# Altium PCB onThyristor 3x.PcbDoc
Units mm, origin at the board's own origin, x right, y up, seen from the top; angles counter-clockwise.
Board outline 152.4 x 101.6 mm, 2 copper layers (Top Layer, Bottom Layer); 43 components, 26 nets, 102 pads, 10 vias.
Unrouted connection lines stored in the file: 1.
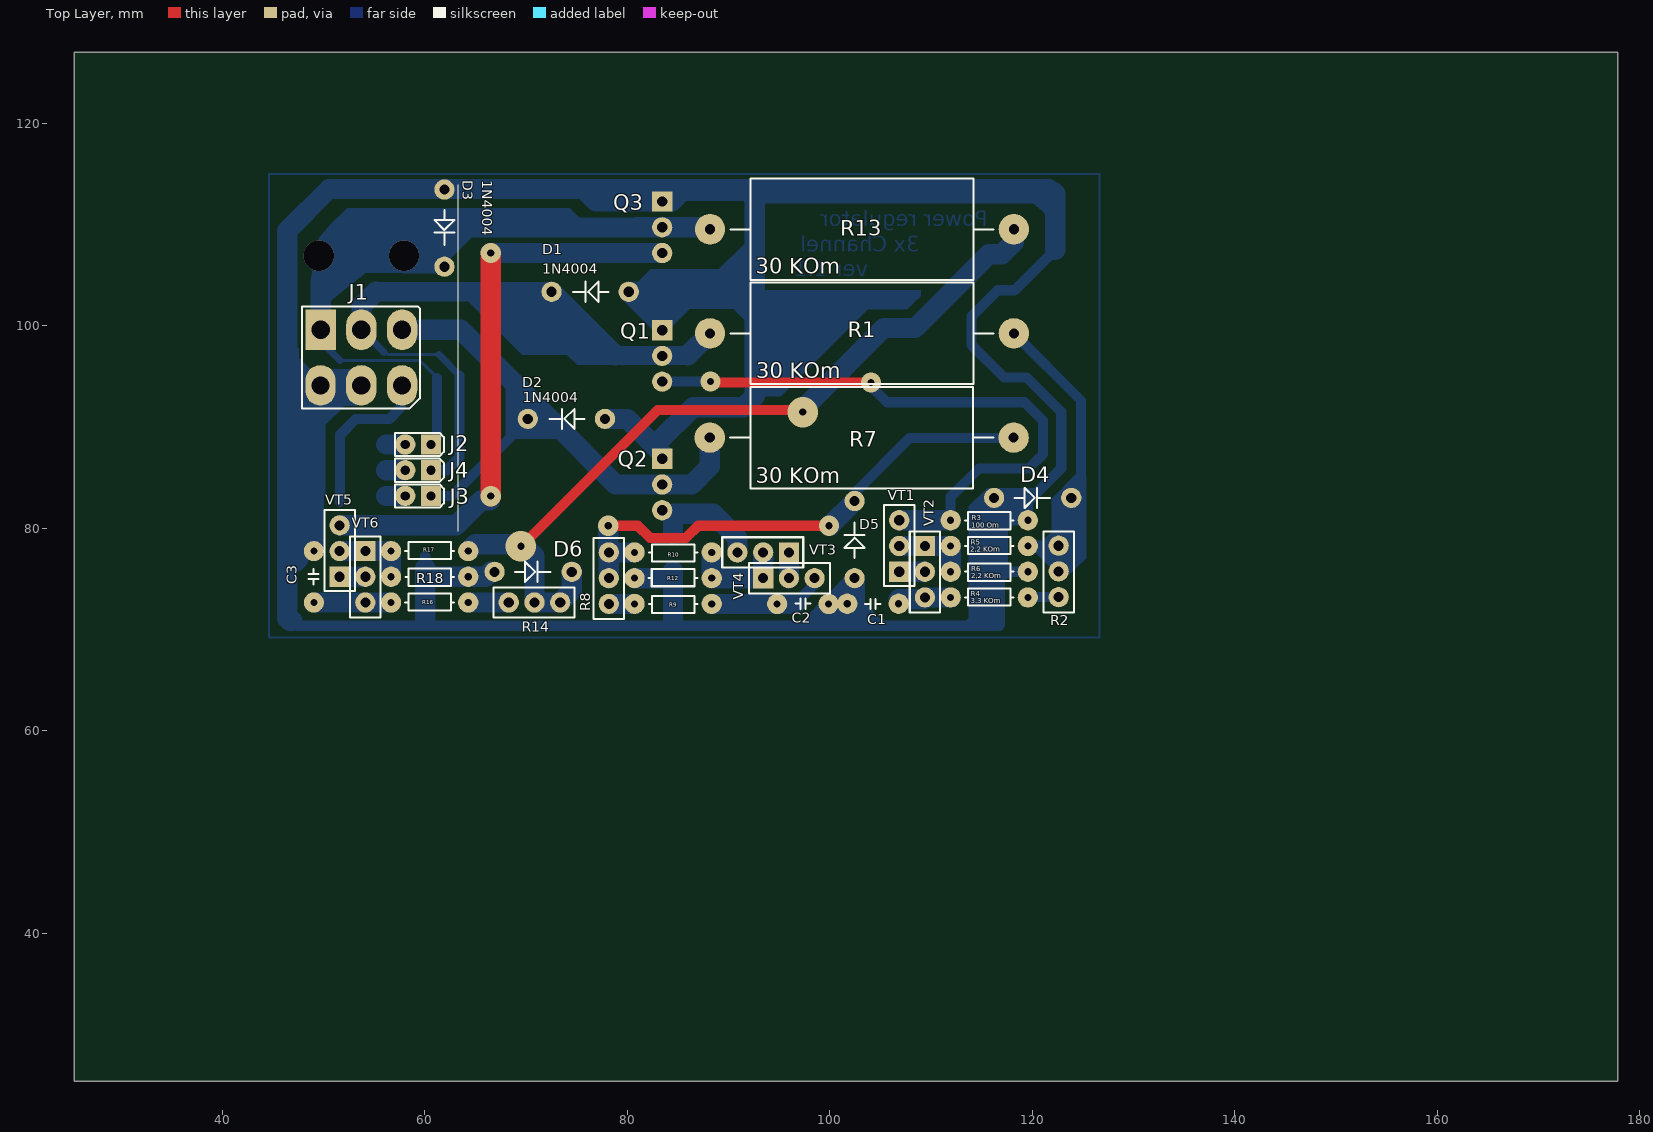
[diagram p0: Top Layer view]
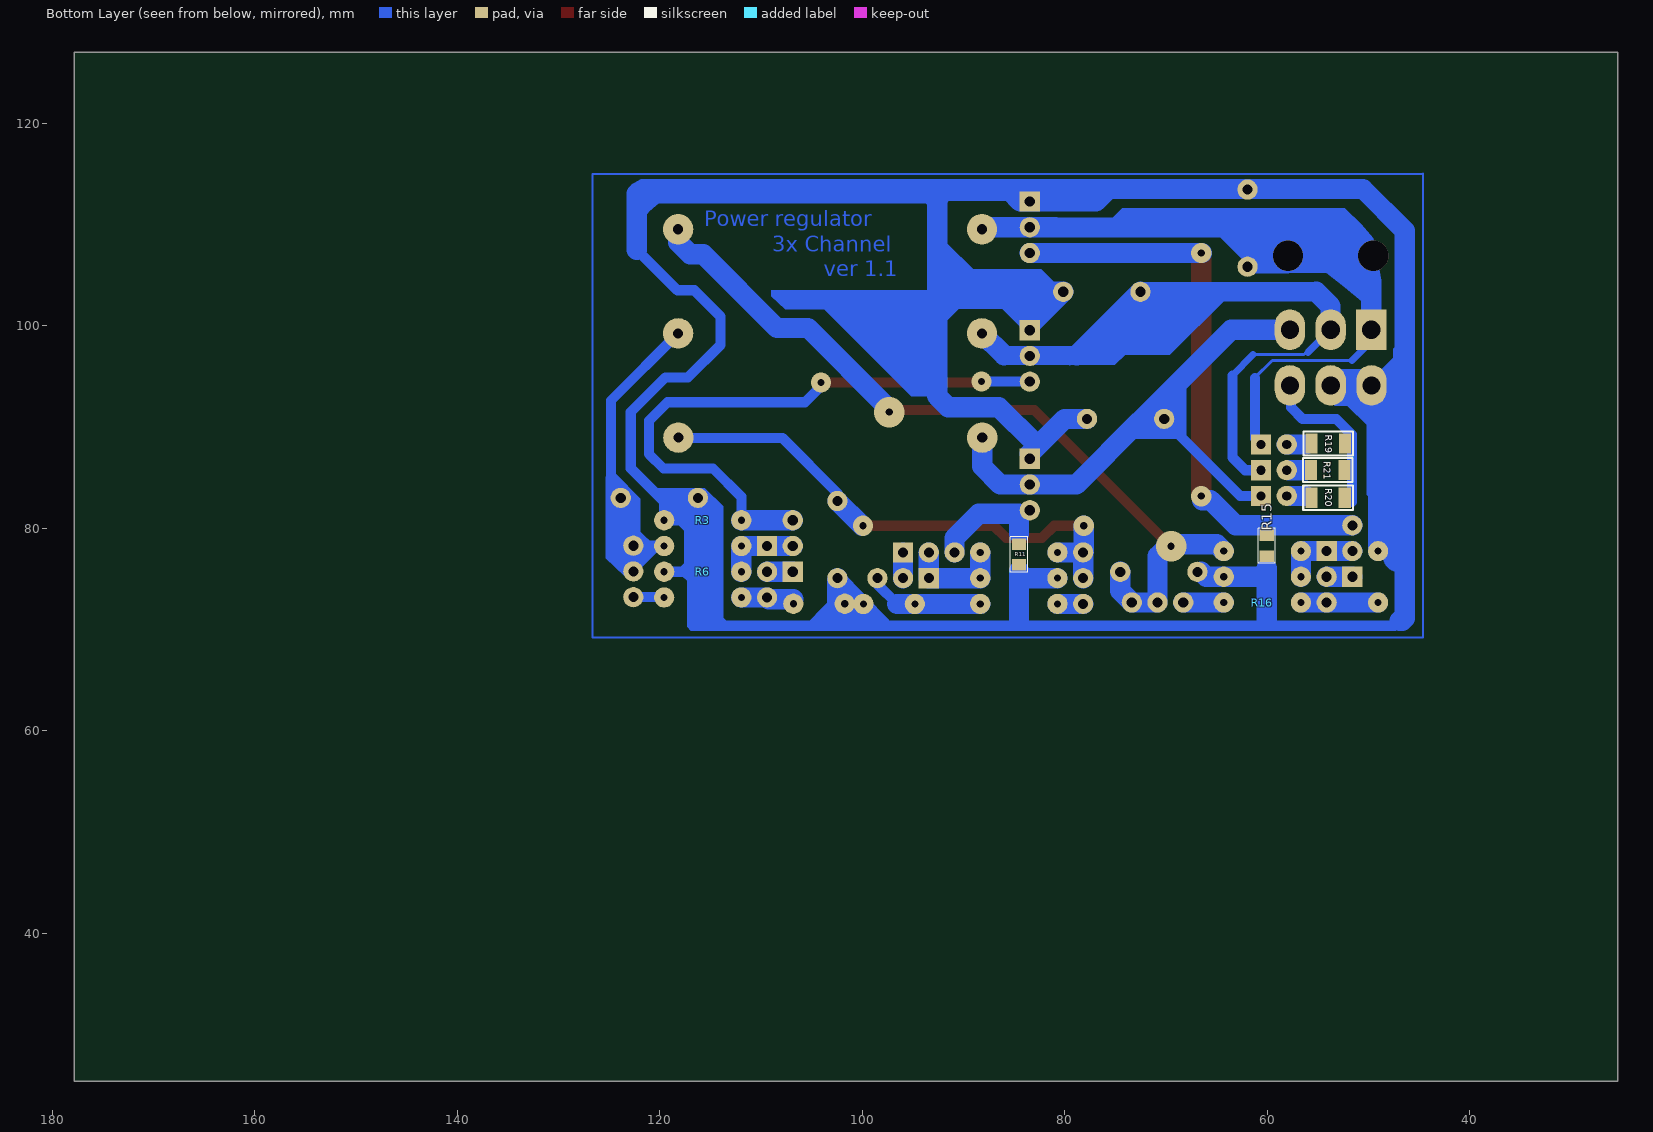
[diagram p1: Bottom Layer view, seen from below]
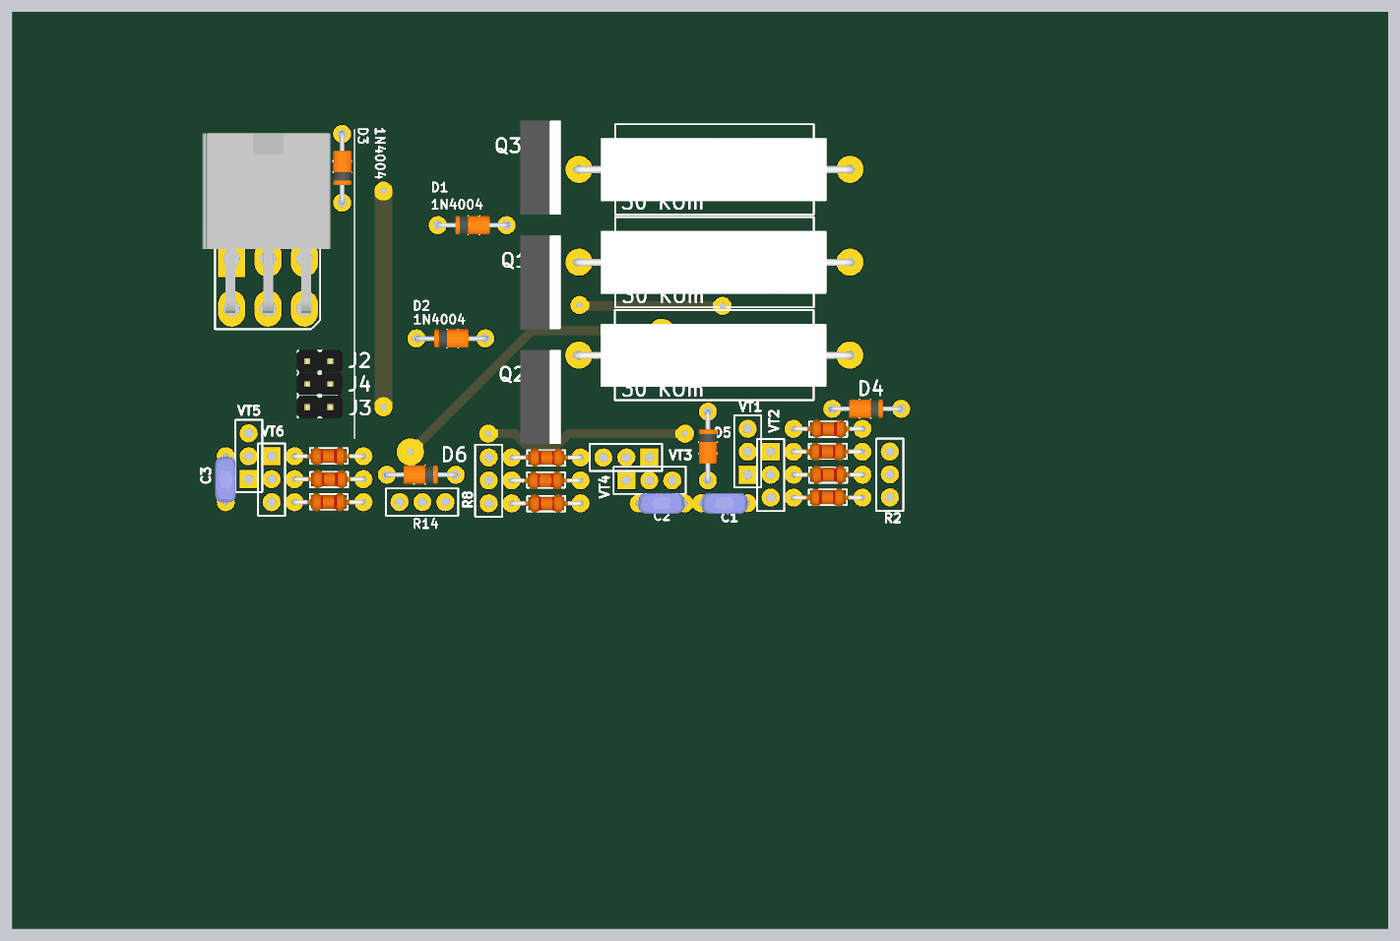
[diagram p2: 3D render of the assembled board from above, using the file's embedded part models]
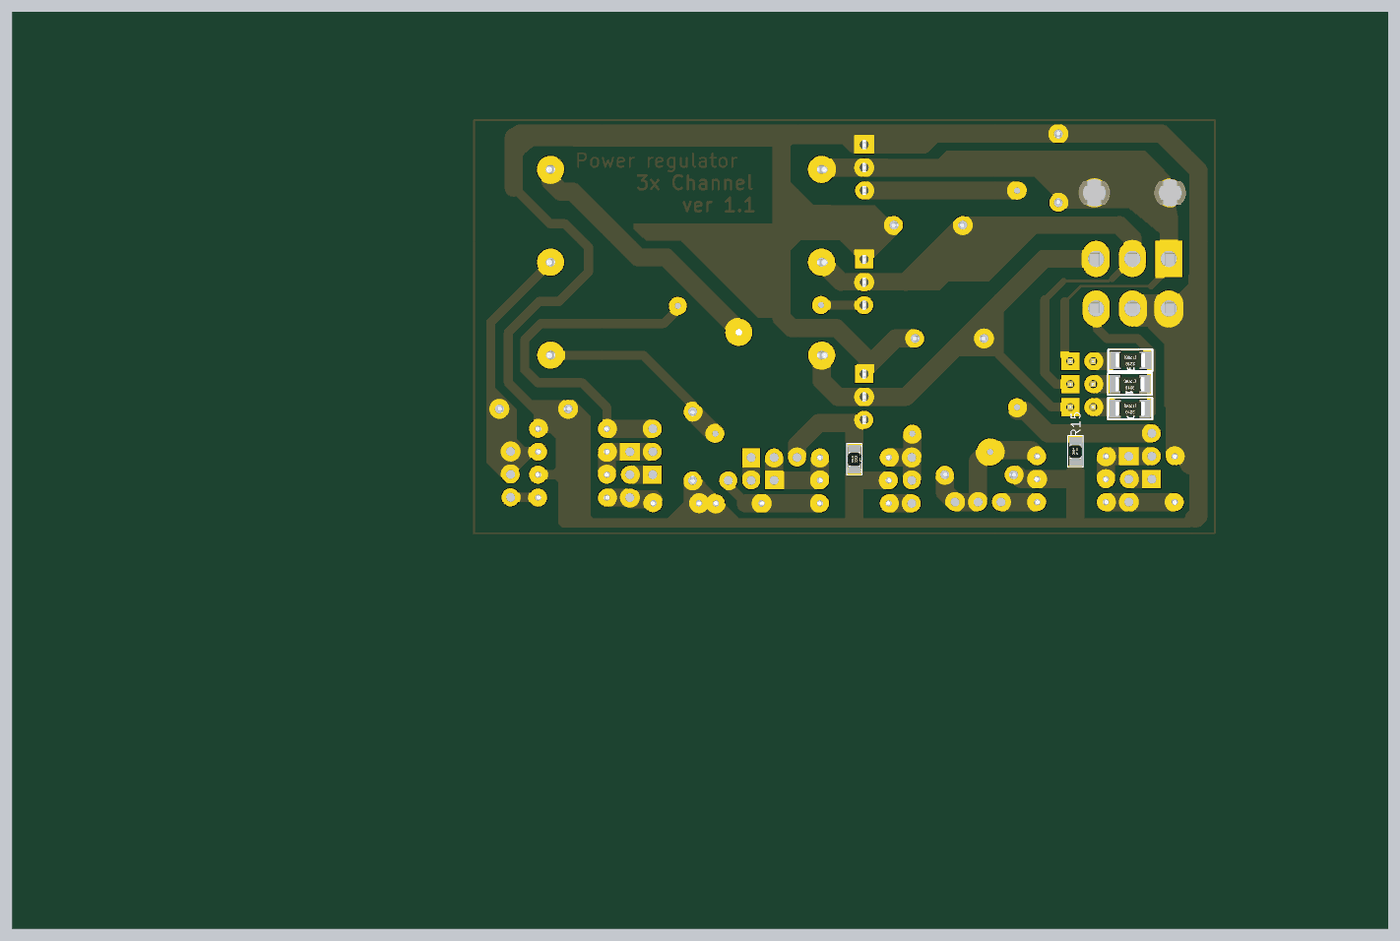
[diagram p3: 3D render of the assembled board from below, using the file's embedded part models]

## Layer stack, top to bottom
Top Solder: solder mask 0.0102, Solder Resist, Dk 3.5
Top Layer: signal copper 0.0356
Dielectric 1: dielectric 0.32, FR-4, Dk 4.8
Bottom Layer: signal copper 0.0356
Bottom Solder: solder mask 0.0102, Solder Resist, Dk 3.5

## Board outline
25.4,25.4 177.8,25.4 177.8,127 25.4,127

## Design rules (kind name [scope] priority, off if disabled: settings)
Clearance [All] p1: gap=0.5
ComponentClearance [All] p1: gap=0 collisioncheckmode=3 verticalgap=0 showdistances=FALSE
PlaneConnect [All] p1: planeconnectstyle=Relief reliefexpansion=0.508 reliefentries=4 reliefconductorwidth=0.254 reliefairgap=1
PolygonConnect [All] p1: connectstyle=Relief reliefconductorwidth=0.254 reliefentries=4 polygonreliefangle="90 Angle" airgapwidth=0.254
RoutingVias [All] p1: holewidth=0.7 width=2 viastyle="Through Hole" minholewidth=0.7 minwidth=2 maxholewidth=0.7 maxwidth=2
SolderMaskExpansion [All] p1: expansion=0.102
Width Width_1 [(InNet('OUT 1') OR InNet('OUT 3') OR InNet('OUT 2'))] p1: maxlimit=3 minlimit=0.3 preferedwidth=1 minimp=50.000000 maximp=50.000000 favimp=50.000000
Width "Width 0,2-3" [All] p2: maxlimit=3 minlimit=1 preferedwidth=1 minimp=50.000000 maximp=50.000000 favimp=50.000000
27 further rules are at their usual default settings.

## Components (designator, comment, footprint, x,y, rotation, side; value= is the part's Value field where it differs from the comment)
C1 "0.1mF" "Cap P5.08MM (3p) disk2" 106.8,72.55 r180 top
C2 "0.1mF" "Cap P5.08MM (3p) disk2" 94.8,72.525 r0 top
C3 "0.1mF" "Cap P5.08MM (3p) disk2" 49.06,72.67 r90 top
D1 "1N4004" "Diode DO-35" 80.15,103.35 r180 top
D2 "1N4004" "Diode DO-35" 77.8,90.8 r180 top
D3 "1N4004" "Diode DO-35" 61.95,113.45 r270 top
D4 "BZX55C" "Diode DO-35" 116.225,83 r0 top
D5 "BZX55C" "Diode DO-35" 102.45,75.075 r90 top
D6 "BZX55C" "Diode DO-35" 66.9,75.7 r0 top
J1 "connector" "Molex Mini-Fit Jr - 6Pin R" 57.765,99.61 r270 top
J2 "PLS-2" "Line 2.54 x 2" 60.62,88.275 r270 top
J3 "PLS-2" "Line 2.54 x 2" 60.62,83.195 r270 top
J4 "PLS-2" "Line 2.54 x 2" 60.62,85.735 r270 top
Q1 "BT151-500R" TO220-2 83.45,99.56 r180 top
Q2 "BT151-500R" TO220-2 83.45,86.86 r180 top
Q3 "BT151-500R" TO220-2 83.45,112.26 r180 top
R1 "30 KOm" "Res 5W L22mm, p30mm" 118.175,99.25 r180 top
R2 "100K" "PinLine 3x" 122.6,73.2 r90 top
R3 "100 Om" "Res p7.62 (4p) 0.25w"#1 119.555,80.79 r0 bottom
R4 "3.3 KOm" "Res p7.62 (4p) 0.25w"#2 111.935,73.17 r0 top
R5 "2,2 KOm" "Res p7.62 (4p) 0.25w"#2 111.935,78.25 r0 top
R6 "2,2 KOm" "Res p7.62 (4p) 0.25w"#1 119.555,75.71 r0 bottom
R7 "30 KOm" "Res 5W L22mm, p30mm" 118.15,88.95 r180 top
R8 "100K" "PinLine 3x" 78.18,72.535 r90 top
R9 "3.3 ROm" "Res p7.62 (4p) 0.25w"#2 88.34,72.535 r180 top
R10 "2.2 KOm" "Res p7.62 (4p) 0.25w"#2 88.34,77.615 r180 top
R11 "100 Om" "SMD 0805 (2012)" 84.5,76.4 r90 bottom
R12 "2.2 KOm" "Res p7.62 (4p) 0.25w"#2 80.72,75.075 r0 top
R13 "30 KOm" "Res 5W L22mm, p30mm" 118.175,109.525 r180 top
R14 "100K" "PinLine 3x" 68.3,72.675 r0 top
R15 "100Om" "SMD 0805 (2012)" 60.025,77.25 r90 bottom
R16 "3.3K" "Res p7.62 (4p) 0.25w"#1 56.68,72.67 r180 bottom
R17 "2,2К" "Res p7.62 (4p) 0.25w"#2 56.68,77.75 r0 top
R18 "2,2К" "Res p7.62 (4p)" 64.3,75.21 r180 top
R19 "120 KOm" "SMD 1206 (3216)" 52.325,88.375 r0 bottom
R20 "120 KOm" "SMD 1206 (3216)" 52.35,83.025 r0 bottom
R21 "120 KOm" "SMD 1206 (3216)" 52.375,85.75 r0 bottom
VT1 "КТ315Б" "Trnstr (3p) ECB" 106.855,80.79 r270 top
VT2 "КТ361Б" "Trnstr (3p) ECB" 109.395,73.17 r90 top
VT3 "КТ315Б" "Trnstr (3p) ECB" 90.88,77.615 r0 top
VT4 "КТ361Б" "Trnstr (3p) ECB" 98.5,75.075 r180 top
VT5 "КТ315Б" "Trnstr (3p) ECB" 51.6,80.29 r270 top
VT6 "КТ361Б" "Trnstr (3p) ECB" 54.14,72.67 r90 top

## Footprints (in the part's own frame and the unit in brackets; to place one, negate y for a bottom-side part, rotate by r counter-clockwise, add the part's x,y. Pads: shape width x height; smd on the part's side, far side on the other; paste and mask are expansions set on the pad)
"Cap P5.08MM (3p) disk2" [mm]
  round 2 hole 0.7: 1(0,0) 2(5.08,0)
  silkscreen extent 1.8,-0.48 3.3,0.53, body extent -0.29,-1.12 5.29,1.16, height 6.04
"Diode DO-35" [mm] "p7.62mm"
  round 2 hole 1: A(0,0) K(7.62,0)
  silkscreen extent 2,-1 5.5,1, body extent -0.32,-1 7.82,1.02, height 2.21
"Line 2.54 x 2" [mm]
  rect 2x2 hole 0.9: 1(0,0)
  round 2 hole 0.9: 2(0,-2.54)
  silkscreen extent -1.15,-3.57 1.15,1.28, body extent -1.25,-3.69 1.25,1.39, height 8.3
"Molex Mini-Fit Jr - 6Pin R" [mm] "Molex Mega-Fit"
  rect 4x3 hole 1.8: 1(0,-8.04)
  oval 4x3 hole 1.8: 2(0,-4.02) 3(0,0) 4(5.5,-8.05) 5(5.5,-4.025) 6(5.5,0)
  silkscreen extent -2.3,-9.9 7.78,1.75, body extent -13.92,-11.3 6.02,2.9, height 11.4
"PinLine 3x" [mm]
  round 2 hole 1: 1(0,0) 2(5.08,0) 3(2.54,0)
  silkscreen extent -1.5,-1.5 6.5,1.5
"Res 5W L22mm, p30mm" [mm] "L22mm p30; horisontal"
  round 3 hole 1: 1(0,0) 2(30,0)
  silkscreen extent 2,-5 28,5, body extent -0.56,-3.48 30.72,3.52, height 8.35
"Res p7.62 (4p)" [mm] "L p7.62; horisontal"
  round 2 hole 0.7: 1(0,0) 2(7.62,0)
  silkscreen extent 1.4,-0.8 6.2,0.9, body extent -0.3,-1 7.8,1, height 2.1
"Res p7.62 (4p) 0.25w"#1 [mm] "L p7.62; horisontal"
  round 2 hole 0.7: 1(0,0) 2(-7.62,0)
  body extent -7.8,-1 0.3,1, height 2.1
"Res p7.62 (4p) 0.25w"#2 [mm] "L p7.62; horisontal"
  round 2 hole 0.7: 1(0,0) 2(7.62,0)
  silkscreen extent 1.4,-0.8 6.2,0.9, body extent -0.3,-1 7.8,1, height 2.1
"SMD 0805 (2012)" [mil]
  rect 45x55 smd: 1(0.35,0.98) 2(80.35,0.98)
  silkscreen extent -29,-32 109,34, body extent 1,-24 80,26, height 18
"SMD 1206 (3216)" [mm]
  rect 1.2x2 smd: 1(0,0) 2(3.3,0)
  silkscreen extent -0.8,-1.2 4.1,1.2, body extent 0.05,-0.8 3.25,0.8, height 0.55
TO220-2 [mm]
  rect 2x2 hole 1: 1(0,0)
  round 2 hole 1: 2(0,2.54) 3(0,5.08)
  body extent -2.7,-2.65 1.8,7.75, height 19
"Trnstr (3p) ECB" [mm] "L p7.62; horisontal"
  rect 2x2 hole 1: B(5.08,0)
  round 2 hole 1: C(2.54,0) E(0,0)
  silkscreen extent -1.5,-1.5 6.5,1.5

## Part data
C1 C2 C3: library part "Cap Ceramic", "Capacitor"
D1 D2 D3: library part "Diode 1N4004", "1 Amp General Purpose Rectifier"
D4 D5 D6: library part "Stabistor BZX55C", "1 Amp General Purpose Rectifier"
J1: library part "Molex Mini-Fit Jr - 6 pin - R", "Right, Dbl line, Female"
J2 J3 J4: "Vert, Sgl line, Male"
Q1 Q2 Q3: library part "Th BT151-500R", "Thyristor"
R1 R7 R13: library part "Res 5W", "5W Cement"
R2 R8 R14: library part "Resistor Adj"
R3 R4 R5 R6 R15 R16 R17 R18: library part Resistor
R9 R10 R11 R12: library part "Res SMD 0603"
R19 R20 R21: library part "Res Carbon"
VT1 VT3 VT5: library part NPN
VT2 VT4 VT6: library part PNP

## Via types
v1: diameter 2, hole 0.7, Top Layer to Bottom Layer, 6 vias
v2: diameter 3, hole 0.7, Top Layer to Bottom Layer, 2 vias
v3: diameter 3, hole 3, Top Layer to Bottom Layer, 2 vias

## Nets (pads, with @x,y where several pads share a name; then routed paths per layer and width w, separated by ;. In a path a pad name is that pad's centre, name@x,y a point inside that pad or via, vN(x,y) a via of type N, cw(c..) or ccw(c..) an arc to the next point about the centre after c; other vN are vias at no path point)
"220 IN FASE": J1.6 R19.1 R20.1 R21.1 | length 16
  Bottom Layer w1: 51.65,82.6 51.65,89.25 53.175,90.775 56.525,90.775 ; 56.5,90.775 57.65,91.925 J1.6@57.65,94.11
"220 IN ZERO": C1.2 C2.2 C3.2 D1.A D2.A D3.A D4.A D5.A D6.A J1.4 J1.5 Q1.1 Q2.1 Q3.1 R3.1 R6.1 R11.1 R12.1 R15.1 R18.1 | length 586.6
  Bottom Layer w0.2: 44.625,115 126.65,115 126.65,69.225 44.625,69.225 44.625,115.025
  Bottom Layer w1: 46.925,70.875 47.425,70.375 99.545,70.375 ; 47.4,94.11 J1.4 49.3,93.695 49.3,84.855 ; R15.1 60.05,76.05 60.89,75.21 ; D6.A@66.525,75.7 D6.A ; Q2.1 Q2.1@83.45,87.35 ; 83.8,75.075 84.525,75.8 ; 102.45,73.28 C1.2 99.545,70.375 ; D4.A 118.435,80.79 ; 116.625,76.8 117.715,75.71 R6.1 ; 122.25,107.5 118.25,103.5 116.575,103.5 113.975,100.9 113.975,98.125 117.2,94.9 119.425,94.9 122.85,91.475 122.85,85.925 119.555,82.63 R3.1 118.435,80.79 ; 99.545,70.375 113.6,70.375 116.625,73.4 116.625,79.5 117.915,80.79 118.435,80.79
  Bottom Layer w2: 46.925,70.875 46.675,70.875 46.425,71.125 46.425,109.375 50.55,113.5 75.675,113.5 76.915,112.26 Q3.1 84.385,112.26 85.45,113.325 91.825,113.325 92.6,112.55 92.6,93.05 91.5,91.95 86.5,91.95 82.925,88.375 ; C3.2 49.06,84.14 ; J1.4 J1.5 ; 60.05,70.95 60.05,76.05 ; 60.89,75.21 R18.1 66.035,75.21 D6.A@66.525,75.7 ; D2.A 80,90.8 Q2.1@83.45,87.35 ; D1.A 83.45,100.05 83.45,100.65 87.425,104.625 89.5,104.625 92.5,107.625 ; R12.1 83.8,75.075 ; 84.525,70.95 84.525,75.8 ; 102.45,73.28 D5.A ; 122.25,107.5 122.25,113.05
  Bottom Layer w3: 47.075,77.175 47.075,83.325
NetC1_1: C1.1 R4.1 VT2.E | length 5
  Bottom Layer w2: C1.1@106.8,73 VT2.E@109.225,73 ; VT2.E R4.1
NetC2_1: C2.1 R9.1 VT4.E | length 11.6
  Bottom Layer w1: 96.56,72.535 98.5,74.475 VT4.E
  Bottom Layer w2: R9.1 96.56,72.535
NetC3_1: C3.1 R16.1 VT6.E | length 7.6
  Bottom Layer w2: C3.1 VT6.E R16.1
NetD4_K: D4.K R1.1 R2.2 R2.3 R5.2 | length 30.4
  Bottom Layer w1: R1.1@118.175,99.05 R1.1 124.8,92.625 124.8,83.955 D4.K 123.845,79.525 R2.2 ; R5.2@119.585,78.28 R2.2 ; R2.3 R2.2
NetD5_K: D5.K R7.1 R8.2 R8.3 R10.2 | length 52.7
  Top Layer w1: v1(78.125,80.25) 81.05,80.25 82.25,79.05 85.8,79.05 87,80.25 v1(99.925,80.25)
  Bottom Layer w1: D5.K 102.45,83.48 107.895,88.925 118.125,88.925 R7.1
  Bottom Layer w2: R8.2@78.125,77.67 v1(78.125,80.25) ; R8.3 R8.2 R10.2 ; v1@100.005,80.25 D5.K
NetD6_K: D6.K R13.1 R14.2 R14.3 R17.2 | length 81.3
  Top Layer w1: v2@69.275,77.95 83,91.675 96.05,91.675 96.5,91.225 v2@97.45,91.225
  Bottom Layer w1: v2@97.45,91.375 v2@97.45,91.875
  Bottom Layer w2: R17.2 64.975,78.425 69.675,78.425 70.84,77.26 R14.3 R14.2 74.52,73.815 D6.K ; v2@97.45,91.875 105.35,99.775 108.425,99.775 115.7,107.05 117,107.05 118.175,108.225 R13.1
  other v2: 69.5,78.225 97.325,91.475
NetJ2_2: J2.2 R19.2 | length 1.9
  Bottom Layer w2: R19.2@56.2,88.275 J2.2
NetJ3_2: J3.2 R20.2 | length 1.6
  Bottom Layer w2: R20.2@56.175,83.195 J3.2@57.8,83.195
NetJ4_2: J4.2 R21.2 | length 1.6
  Bottom Layer w2: R21.2@56.2,85.735 J4.2@57.825,85.735
NetQ1_3: Q1.3 R3.2 VT1.E | length 60.6
  Top Layer w1: v1@88.325,94.4 v1(104.075,94.4)
  Bottom Layer w1: Q1.3 v1@88.205,94.48 ; v1@103.975,94.125 105.65,92.45 119.225,92.45 121.05,90.625 121.05,87.325 119.625,85.9 114.725,85.9 111.935,83.11 R3.2
  Bottom Layer w2: VT1.E R3.2
  other v1: 88.225,94.5
NetQ2_3: Q2.3 R11.2 VT3.E | length 10.7
  Bottom Layer w2: 84.525,79.45 84.525,81.425 88.5,81.425 90.88,79.045 VT3.E
NetQ3_3: Q3.3 R15.2 VT5.E | length 56.9
  Top Layer w2: v1(66.525,83.175) v1(66.525,107.175)
  Bottom Layer w2: VT5.E 63.115,80.29 65.6,82.775 v1@66.45,82.775 ; v1@66.45,107.18 Q3.3
NetR2_1: R2.1 R4.2 | length 3
  Bottom Layer w1: R4.2@119.585,73.2 R2.1
NetR5_1: R5.1 R6.2 VT1.C VT2.B | length 7.6
  Bottom Layer w2: VT1.C VT2.B R5.1 R6.2
NetR8_1: R8.1 R9.2 | length 2.5
  Bottom Layer w2: R8.1 R9.2
NetR10_1: R10.1 R12.2 VT3.C VT4.B | length 10.2
  Bottom Layer w2: R10.1 R12.2 VT4.B VT3.C
NetR14_1: R14.1 R16.2 | length 4
  Bottom Layer w2: R16.2@64.305,72.675 R14.1
NetR17_1: R17.1 R18.2 VT5.C VT6.B | length 7.6
  Bottom Layer w2: VT5.C VT6.B R17.1 R18.2
NetVT1_B: VT1.B VT2.C | length 2.5
  Bottom Layer w2: VT1.B VT2.C
NetVT3_B: VT3.B VT4.C | length 2.5
  Bottom Layer w2: VT4.C VT3.B
NetVT5_B: VT5.B VT6.C | length 2.5
  Bottom Layer w2: VT5.B VT6.C
"OUT 1": D3.K J1.1 J2.1 Q3.2 R13.2 | length 70.6
  Bottom Layer w0.3: 51.65,96.575 59.5,96.575 61.225,94.85
  Bottom Layer w0.7: J1.1@49.725,98.5 51.65,96.575
  Bottom Layer w1: J1.1@49.725,98.5 J1.1 ; J2.1 61.225,88.88 61.225,94.85 ; D3.K 61.95,109.45 ; Q3.2 Q3.2@83.695,109.475
  Bottom Layer w2: J1.1 49.725,104.275 55.15,109.7 81.15,109.7 ; 80.945,109.725 R13.2@88.25,109.725
  other v3: 49.55,106.925 57.95,106.925
"OUT 2": D2.K J1.3 J3.1 Q2.2 R7.2 | length 54.9
  Bottom Layer w1: J3.1 62.67,83.195 D2.K@70.075,90.6 ; D2.K 70.18,93
  Bottom Layer w2: J1.3 63.57,99.61 70.18,93 72.505,90.675 ; 72.58,90.6 78.86,84.32 Q2.2 86.37,84.32 88.15,86.1 R7.2
"OUT 3": D1.K J1.2 J4.1 Q1.2 R1.2 | length 64.1
  Bottom Layer w0.3: 55.98,97.375 56.15,97.375 56.375,97.15 61.4,97.15
  Bottom Layer w0.7: J1.2 55.98,97.375 ; 61.4,97.15 63.45,95.1
  Bottom Layer w1: J1.2@53.745,99.38 J1.2 ; J1.2@53.75,99.35 J1.2@53.75,99.38 ; J4.1 62.185,85.735 63.45,87 63.45,95.1
  Bottom Layer w1.9: 55.175,103.35 D1.K ; 78.81,97.07 85.995,97.07
  Bottom Layer w2: J1.2@53.75,99.61 53.75,101.925 55.175,103.35 ; D1.K 78.81,97.07 ; 85.995,97.07 R1.2

## Other copper
Bottom Layer:
  region net "220 IN ZERO": 106.2,70.3 105.775,70.3 103.45,72.625 103.45,75.075 101.475,75.225 96.8,70.325
  region net "220 IN ZERO": 84.3,99.825 86.15,101.675 90.475,101.675 92.6,99.55 92.6,93.05 95.175,93.05 103.75,101.625 107.6,101.625 108.975,102.925 108.975,103.525 92.475,103.525 92.475,105.25 91.4,106.325 89.475,104.4 82.9,104.4
  region net NetD4_K: 124.35,85.375 121.9,82.925 121.9,79.675 120.55,78.325 120.6,78.275 120.6,77.975 120.425,77.975 120.2,77.75 121.775,76.175 121.775,75.85 123.5,75.325 125.3,77.025 125.3,85.1
  region net "220 IN ZERO": 121.025,84.8 120.2,83.975 115.525,83.975 113.725,82.175 113.725,69.95 113.7,69.875 116.95,69.875 117.3,70.3 117.3,74.825 117.75,75.275 117.575,75.45 117.575,80.55 118.65,80.55 119.125,81.025
  region net "220 IN ZERO": 122.825,113.9 121.85,114.475 73.675,114.475 72.925,113.725 73.9,112.75 80.725,112.75 81.65,111.825 82.6,112.775 91.825,112.775 93.125,111.475 93.675,112.025 120.075,112.075 121.025,111.3 121.65,110.525 122.075,111.9
  region net "220 IN ZERO": 47.2,98.125 47.575,97.75 47.575,96.825 48.85,95.55 49,95.7 53.85,95.7 53.85,92.575 53.35,92.075 52.05,92.075 52.05,92.05 50.2,90.2 50.2,83.325 47.35,80.475
  region net "220 IN ZERO": 79.95,104.325 81.075,104.325 82.325,105.575 87.75,105.575 87.75,105.15 83.2,100.6
  region net "OUT 3": 79.55,96.1 79.45,96.1 75.05,96.15 74.025,97.125 69.625,97.125 63.875,102.875 64.35,103.35 72.53,103.35
  region net "OUT 1": 48.75,104.5 49.55,108.65 50.725,110 52.35,111.6 60.7,111.6 61.025,111.625 74.325,111.625 75.675,110.275 75.675,109.375 65.3,109.375 61.95,106.025 61.6,105.15 54.175,105.25 52.375,103.8 50.6,102.35
  region net "OUT 2": 68.725,94.625 68,94.225 68,88.825 74.125,88.825 74.325,89.025
  text "Power regulator" at 115.6,109.8 h1.5
  text "3x Channel" at 108.875,107.325 h1.52
  text "ver 1.1" at 103.8,104.875 h1.52

## Silkscreen, mask and mechanical layers (free items; w line width, h text height)
Top Overlay:
  lines w0.1: 63.325,79.725 63.325,113.925